# EAGLE board axiom_beta_board_100_v0.16_test-default.fa551eaf (EAGLE 7.7.0), part 1 of 3
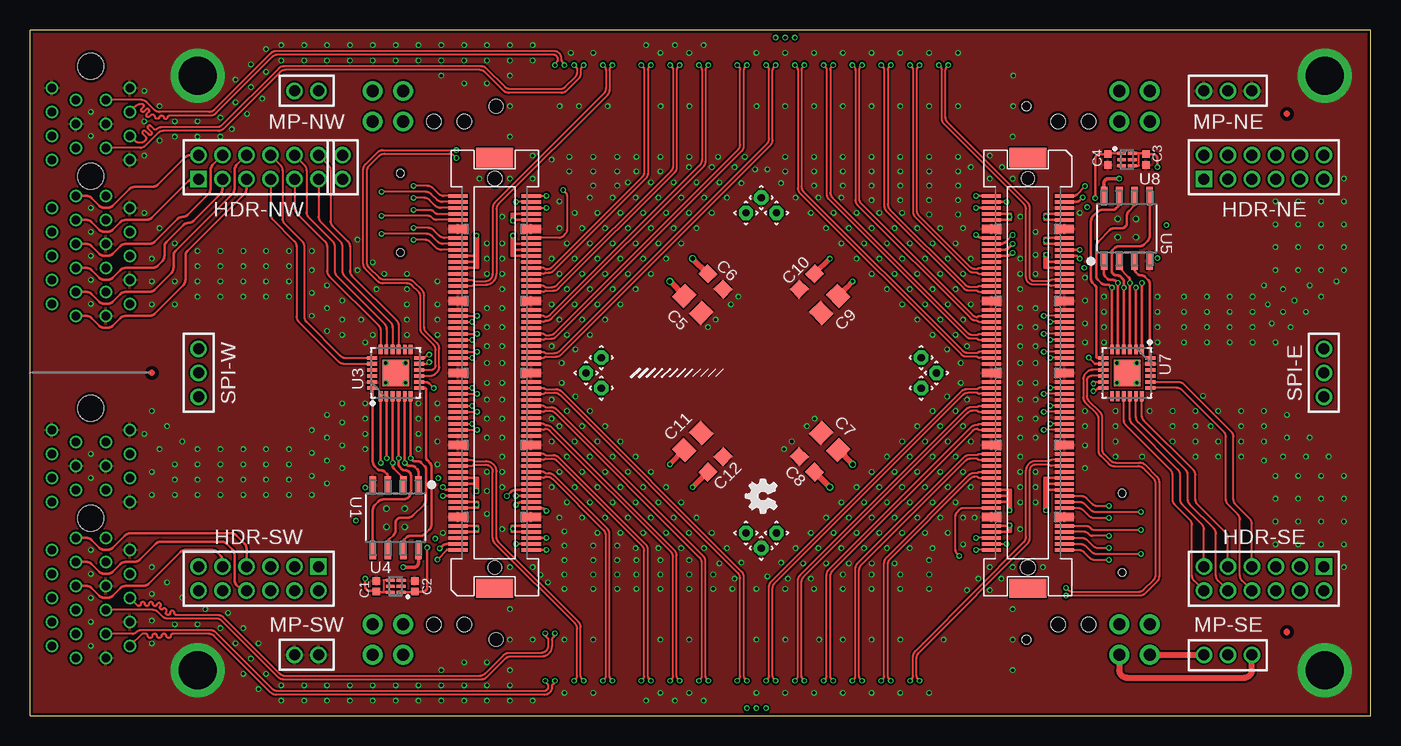
[diagram p0: board, top side]
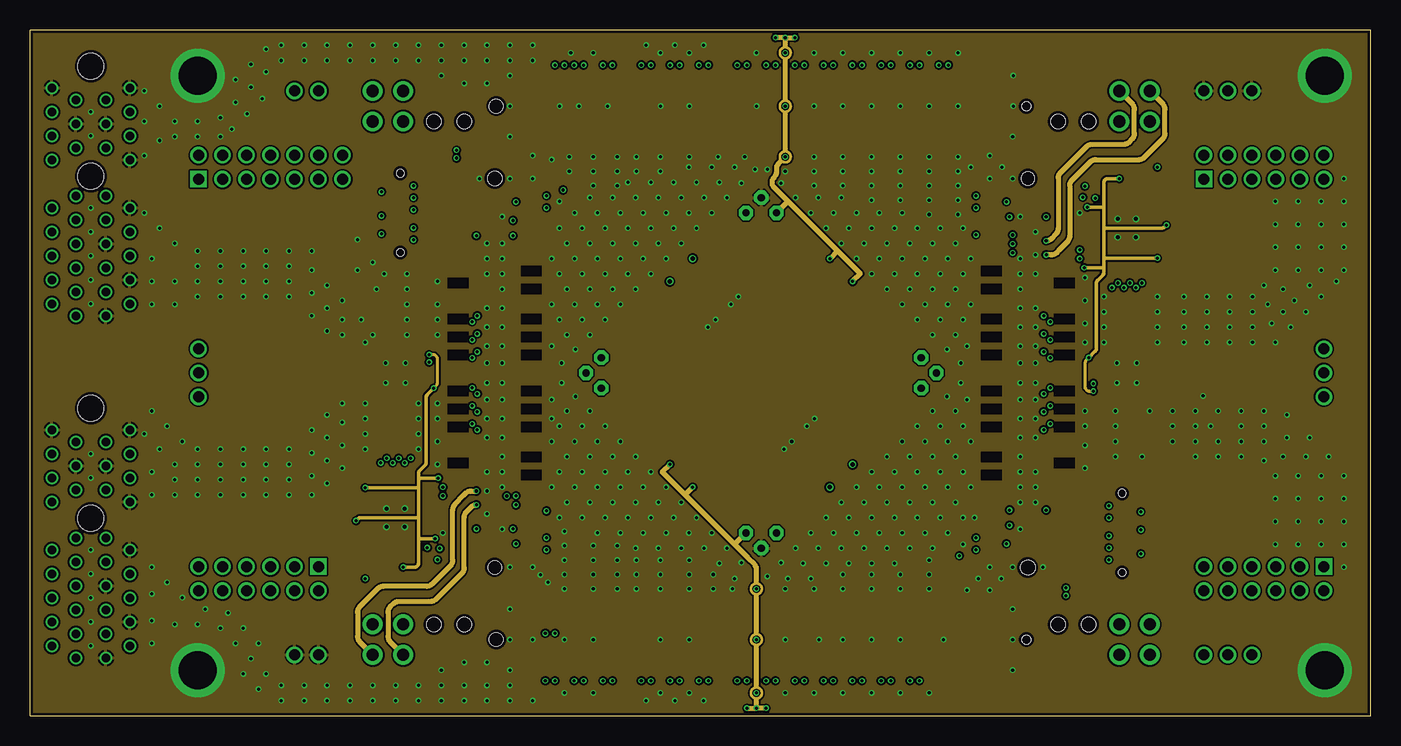
[diagram p1: board, inner layer Route2]
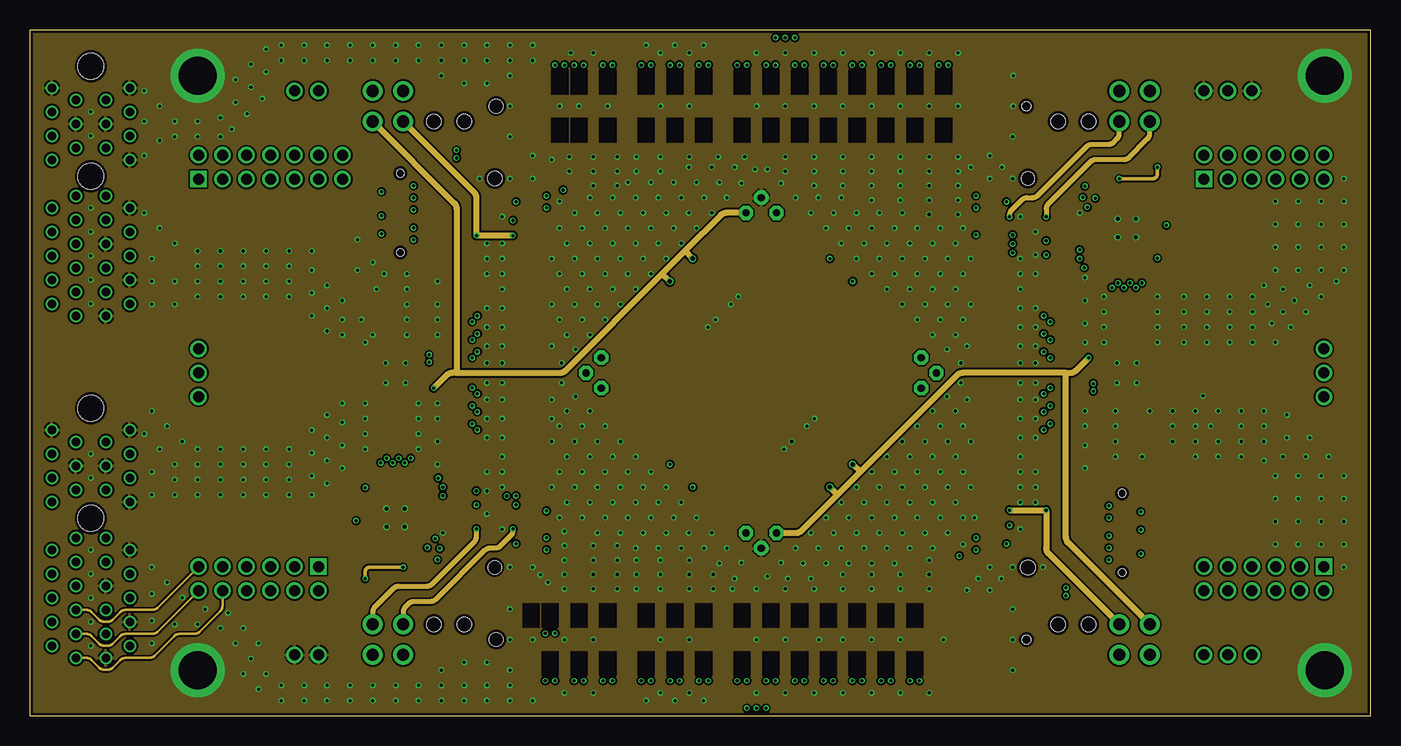
[diagram p2: board, inner layer Route15]
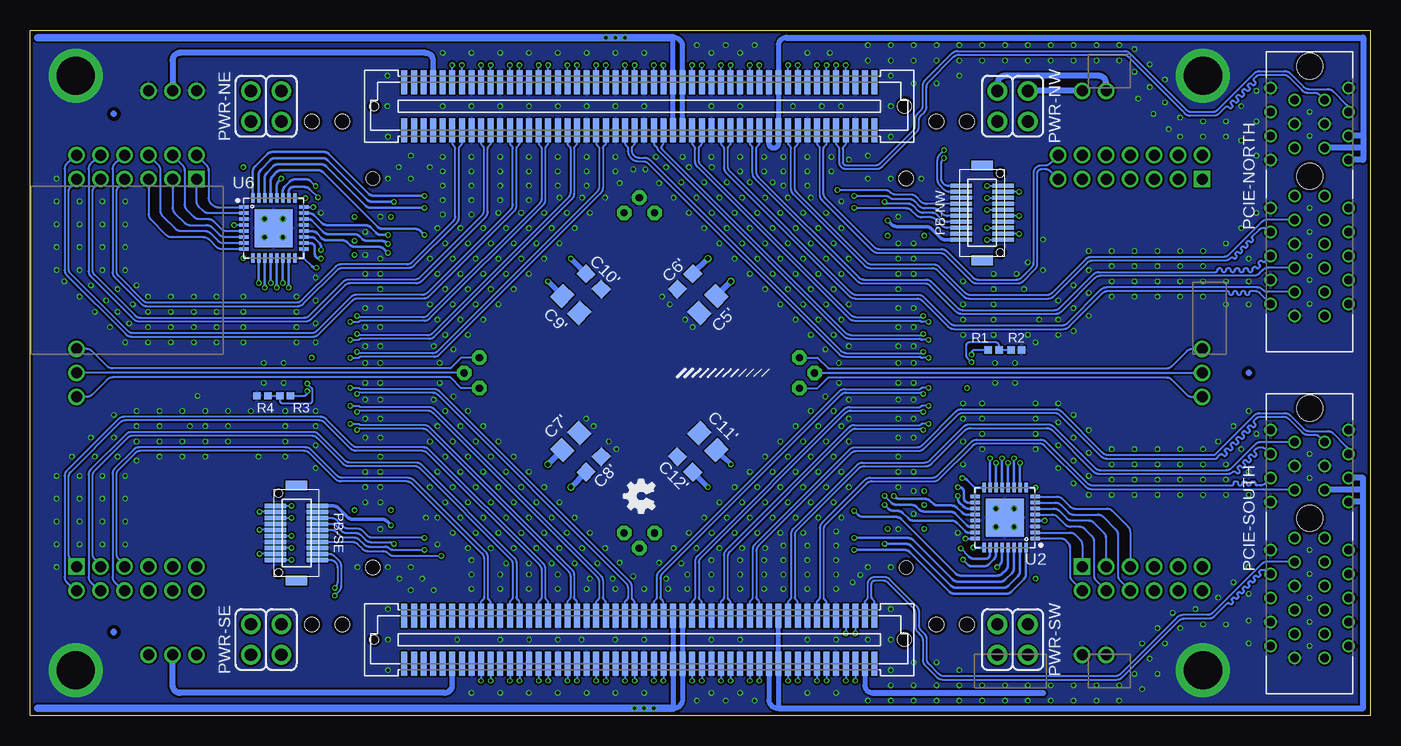
[diagram p3: board, bottom side, seen from below]

Size 111.76 x 57.15 mm. Coordinates in mm from the lower left corner, seen from the top.
Outline: 111.76,57.15 0,57.15 0,0 111.76,0 111.76,57.15
Copper layers (1*2*15*16): Top 0.035559375mm / dielectric 0.17018125mm / Route2 0.01778125mm / dielectric 47mil / Route15 0.01778125mm / dielectric 0.17018125mm / Bottom 0.035559375mm
Design rules "OSHPark-4layer-tuned *": minimum track width 5mil, minimum drill 10mil, track to track 6mil, track to pad 5mil, pad to pad 5mil, via to via 5mil, smd to smd 5mil, copper to edge 10mil, drill to drill 6mil, minimum pad ring 4mil, minimum via ring 4mil, stop-mask expansion 2mil, vias tented up to drill 15mil, thermal gap 6mil
Net classes: 0 default: width 0.152 mm, drill 0.254 mm; 1 power: width 0.152 mm, drill 0.254 mm
Holes 1.2 mm at 33.66,49.53 36.2,49.53 85.72,49.53 88.27,49.53 33.66,7.62 36.2,7.62 85.72,7.62 88.27,7.62
tKeepout: area 105.5,50.8 to 110.5,55.8; area 105.5,1.3 to 110.5,6.3; area 11.5,1.3 to 16.5,6.3; area 11.5,50.8 to 16.5,55.8; area 44.8,12.4 to 77.1,44.7
bKeepout: area 105.5,50.8 to 110.5,55.8; area 105.5,1.3 to 110.5,6.3; area 11.5,1.3 to 16.5,6.3; area 11.5,50.8 to 16.5,55.8
tRestrict: area 104.2,49.6 to 105.3,50.7; area 9.6,28 to 10.7,29.1; area 104.2,6.4 to 105.3,7.5
bRestrict: area 104.2,49.6 to 105.3,50.7; area 9.6,28 to 10.7,29.1; area 104.2,6.4 to 105.3,7.5

## Footprints (pad centres in the part's own frame; a part is rotated, then mirrored left to right if it is on the bottom)
0402-B = smd 0.62 x 0.62: 1 -0.45,0; 2 0.45,0
0805-A = smd 1.35 x 1.55: 1 -1,0; 2 1,0
0603-A = smd 1.15 x 1.1: 1 -0.9,0; 2 0.9,0
2X06M = drill 0.914 square: 1 -5,-1 | drill 0.914: 2 -5,1; 3 -3,-1; 4 -3,1; 5 -1,-1; 6 -1,1; 7 1,-1; 8 1,1; 9 3,-1; 10 3,1; 11 5,-1; 12 5,1
1X02M = drill 0.914: 1 -1,0; 2 1,0
1X03M = drill 0.914: 1 -2,0; 2 0,0; 3 2,0
DF12(XX)-20DP-0.5V = smd 1.8 x 0.35: 1 -1.75,2.25; 2 1.75,2.25; 3 -1.75,1.75; 4 1.75,1.75; 5 -1.75,1.25; 6 1.75,1.25; 7 -1.75,0.75; 8 1.75,0.75; 9 -1.75,0.25; 10 1.75,0.25; 11 -1.75,-0.25; 12 1.75,-0.25; 13 -1.75,-0.75; 14 1.75,-0.75; 15 -1.75,-1.25; 16 1.75,-1.25; 17 -1.75,-1.75; 18 1.75,-1.75; 19 -1.75,-2.25; 20 1.75,-2.25 | smd 1.8 x 0.8: M1 0,3.95; M2 0,-3.95 | hole 0.625: 1.5,-3.3; 1.5,3.3
PCIE-36 = drill 0.7: A1 -11.65,1.25; A2 -10.65,3.25; A3 -9.65,1.25; A4 -8.65,3.25; A5 -7.65,1.25; A6 -6.65,3.25; A7 -5.65,1.25; A8 -4.65,3.25; A9 -3.65,1.25; A10 -2.65,3.25; A11 -1.65,1.25; A12 1.35,3.25; A13 2.35,1.25; A14 3.35,3.25; A15 4.35,1.25; A16 5.35,3.25; A17 6.35,1.25; A18 7.35,3.25; B1 -11.65,-1.25; B2 -10.65,-3.25; B3 -9.65,-1.25; B4 -8.65,-3.25; B5 -7.65,-1.25; B6 -6.65,-3.25; B7 -5.65,-1.25; B8 -4.65,-3.25; B9 -3.65,-1.25; B10 -2.65,-3.25; B11 -1.65,-1.25; B12 1.35,-3.25; B13 2.35,-1.25; B14 3.35,-3.25; B15 4.35,-1.25; B16 5.35,-3.25; B17 6.35,-1.25; B18 7.35,-3.25 | hole 2.15: 0,0; 9.15,0
2X02 = drill 1.016 pad 1.651: 1 -1.27,-1.27; 2 -1.27,1.27; 3 1.27,-1.27; 4 1.27,1.27
SOIC127P600X175-8N = smd 1.473 x 0.559: 1 -2.718,1.905; 2 -2.718,0.635; 3 -2.718,-0.635; 4 -2.718,-1.905; 5 2.718,-1.905; 6 2.718,-0.635; 7 2.718,0.635; 8 2.718,1.905
QFN-32 = smd 0.8 x 0.285: 1 -2.5,1.75; 2 -2.5,1.25; 3 -2.5,0.75; 4 -2.5,0.25; 5 -2.5,-0.25; 6 -2.5,-0.75; 7 -2.5,-1.25; 8 -2.5,-1.75; 17 2.5,-1.75; 18 2.5,-1.25; 19 2.5,-0.75; 20 2.5,-0.25; 21 2.5,0.25; 22 2.5,0.75; 23 2.5,1.25; 24 2.5,1.75 | smd 0.285 x 0.8: 9 -1.75,-2.5; 10 -1.25,-2.5; 11 -0.75,-2.5; 12 -0.25,-2.5; 13 0.25,-2.5; 14 0.75,-2.5; 15 1.25,-2.5; 16 1.75,-2.5; 25 1.75,2.5; 26 1.25,2.5; 27 0.75,2.5; 28 0.25,2.5; 29 -0.25,2.5; 30 -0.75,2.5; 31 -1.25,2.5; 32 -1.75,2.5 | smd 3.15 x 3.15: EP 0,0
QFN50P400X400X80-25N = smd 0.813 x 0.305: 1 -1.956,1.245; 2 -1.956,0.762; 3 -1.956,0.254; 4 -1.956,-0.254; 5 -1.956,-0.762; 6 -1.956,-1.245; 13 1.956,-1.245; 14 1.956,-0.762; 15 1.956,-0.254; 16 1.956,0.254; 17 1.956,0.762; 18 1.956,1.245 | smd 0.305 x 0.813: 7 -1.245,-1.956; 8 -0.762,-1.956; 9 -0.254,-1.956; 10 0.254,-1.956; 11 0.762,-1.956; 12 1.245,-1.956; 19 1.245,1.956; 20 0.762,1.956; 21 0.254,1.956; 22 -0.254,1.956; 23 -0.762,1.956; 24 -1.245,1.956 | smd 2.21 x 2.21: 25 0,0
DFN100X150X50-6N = smd 0.711 x 0.254: 1 -0.457,0.508; 2 -0.457,0; 3 -0.457,-0.508; 4 0.457,-0.508; 5 0.457,0; 6 0.457,0.508
1.2/0.6 = drill 0.6 pad 1.2 octagon: 1 0,0
FX10A-100S/10 = smd 0.3 x 1.6: 1 -14.75,3.05; 2 -14.75,-3.05; 3 -14.25,3.05; 4 -14.25,-3.05; 5 -13.75,3.05; 6 -13.75,-3.05; 7 -13.25,3.05; 8 -13.25,-3.05; 9 -12.75,3.05; 10 -12.75,-3.05; 11 -11.25,3.05; 12 -11.25,-3.05; 13 -10.75,3.05; 14 -10.75,-3.05; 15 -10.25,3.05; 16 -10.25,-3.05; 17 -9.75,3.05; 18 -9.75,-3.05; 19 -9.25,3.05; 20 -9.25,-3.05; 21 -8.75,3.05; 22 -8.75,-3.05; 23 -8.25,3.05; 24 -8.25,-3.05; 25 -7.75,3.05; 26 -7.75,-3.05; 27 -7.25,3.05; 28 -7.25,-3.05; 29 -6.75,3.05; 30 -6.75,-3.05; 31 -5.25,3.05; 32 -5.25,-3.05; 33 -4.75,3.05; 34 -4.75,-3.05; 35 -4.25,3.05; 36 -4.25,-3.05; 37 -3.75,3.05; 38 -3.75,-3.05; 39 -3.25,3.05; 40 -3.25,-3.05; 41 -2.75,3.05; 42 -2.75,-3.05; 43 -2.25,3.05; 44 -2.25,-3.05; 45 -1.75,3.05; 46 -1.75,-3.05; 47 -1.25,3.05; 48 -1.25,-3.05; 49 -0.75,3.05; 50 -0.75,-3.05; 51 0.75,3.05; 52 0.75,-3.05; 53 1.25,3.05; 54 1.25,-3.05; 55 1.75,3.05; 56 1.75,-3.05; 57 2.25,3.05; 58 2.25,-3.05; 59 2.75,3.05; 60 2.75,-3.05; 61 3.25,3.05; 62 3.25,-3.05; 63 3.75,3.05; 64 3.75,-3.05; 65 4.25,3.05; 66 4.25,-3.05; 67 4.75,3.05; 68 4.75,-3.05; 69 5.25,3.05; 70 5.25,-3.05; 71 6.75,3.05; 72 6.75,-3.05; 73 7.25,3.05; 74 7.25,-3.05; 75 7.75,3.05; 76 7.75,-3.05; 77 8.25,3.05; 78 8.25,-3.05; 79 8.75,3.05; 80 8.75,-3.05; 81 9.25,3.05; 82 9.25,-3.05; 83 9.75,3.05; 84 9.75,-3.05; 85 10.25,3.05; 86 10.25,-3.05; 87 10.75,3.05; 88 10.75,-3.05; 89 11.25,3.05; 90 11.25,-3.05; 91 12.75,3.05; 92 12.75,-3.05; 93 13.25,3.05; 94 13.25,-3.05; 95 13.75,3.05; 96 13.75,-3.05; 97 14.25,3.05; 98 14.25,-3.05; 99 14.75,3.05; 100 14.75,-3.05 | smd 0.7 x 1.6: G1 -12,3.05; G2 -12,-3.05; G3 -6,3.05; G4 -6,-3.05; G5 0,3.05; G6 0,-3.05; G7 6,3.05; G8 6,-3.05; G9 12,3.05; G10 12,-3.05 | smd 1.6 x 3.1: M1 -17.95,0; M2 17.95,0 | hole 1.1: -16.2,0 | hole 1.2: 16.2,0
µZ-NOHOLES = smd 0.5 x 2: 1 19.6,-24.226; 2 19.6,-20.226; 3 18.8,-24.226; 4 18.8,-20.226; 5 18,-24.226; 6 18,-20.226; 7 17.2,-24.226; 8 17.2,-20.226; 9 16.4,-24.226; 10 16.4,-20.226; 11 15.6,-24.226; 12 15.6,-20.226; 13 14.8,-24.226; 14 14.8,-20.226; 15 14,-24.226; 16 14,-20.226; 17 13.2,-24.226; 18 13.2,-20.226; 19 12.4,-24.226; 20 12.4,-20.226; 21 11.6,-24.226; 22 11.6,-20.226; 23 10.8,-24.226; 24 10.8,-20.226; 25 10,-24.226; 26 10,-20.226; 27 9.2,-24.226; 28 9.2,-20.226; 29 8.4,-24.226; 30 8.4,-20.226; 31 7.6,-24.226; 32 7.6,-20.226; 33 6.8,-24.226; 34 6.8,-20.226; 35 6,-24.226; 36 6,-20.226; 37 5.2,-24.226; 38 5.2,-20.226; 39 4.4,-24.226; 40 4.4,-20.226; 41 3.6,-24.226; 42 3.6,-20.226; 43 2.8,-24.226; 44 2.8,-20.226; 45 2,-24.226; 46 2,-20.226; 47 1.2,-24.226; 48 1.2,-20.226; 49 0.4,-24.226; 50 0.4,-20.226; 51 -0.4,-24.226; 52 -0.4,-20.226; 53 -1.2,-24.226; 54 -1.2,-20.226; 55 -2,-24.226; 56 -2,-20.226; 57 -2.8,-24.226; 58 -2.8,-20.226; 59 -3.6,-24.226; 60 -3.6,-20.226; 61 -4.4,-24.226; 62 -4.4,-20.226; 63 -5.2,-24.226; 64 -5.2,-20.226; 65 -6,-24.226; 66 -6,-20.226; 67 -6.8,-24.226; 68 -6.8,-20.226; 69 -7.6,-24.226; 70 -7.6,-20.226; 71 -8.4,-24.226; 72 -8.4,-20.226; 73 -9.2,-24.226; 74 -9.2,-20.226; 75 -10,-24.226; 76 -10,-20.226; 77 -10.8,-24.226; 78 -10.8,-20.226; 79 -11.6,-24.226; 80 -11.6,-20.226; 81 -12.4,-24.226; 82 -12.4,-20.226; 83 -13.2,-24.226; 84 -13.2,-20.226; 85 -14,-24.226; 86 -14,-20.226; 87 -14.8,-24.226; 88 -14.8,-20.226; 89 -15.6,-24.226; 90 -15.6,-20.226; 91 -16.4,-24.226; 92 -16.4,-20.226; 93 -17.2,-24.226; 94 -17.2,-20.226; 95 -18,-24.226; 96 -18,-20.226; 97 -18.8,-24.226; 98 -18.8,-20.226; 99 -19.6,-24.226; 100 -19.6,-20.226; 101 19.6,20.226; 102 19.6,24.226; 103 18.8,20.226; 104 18.8,24.226; 105 18,20.226; 106 18,24.226; 107 17.2,20.226; 108 17.2,24.226; 109 16.4,20.226; 110 16.4,24.226; 111 15.6,20.226; 112 15.6,24.226; 113 14.8,20.226; 114 14.8,24.226; 115 14,20.226; 116 14,24.226; 117 13.2,20.226; 118 13.2,24.226; 119 12.4,20.226; 120 12.4,24.226; 121 11.6,20.226; 122 11.6,24.226; 123 10.8,20.226; 124 10.8,24.226; 125 10,20.226; 126 10,24.226; 127 9.2,20.226; 128 9.2,24.226; 129 8.4,20.226; 130 8.4,24.226; 131 7.6,20.226; 132 7.6,24.226; 133 6.8,20.226; 134 6.8,24.226; 135 6,20.226; 136 6,24.226; 137 5.2,20.226; 138 5.2,24.226; 139 4.4,20.226; 140 4.4,24.226; 141 3.6,20.226; 142 3.6,24.226; 143 2.8,20.226; 144 2.8,24.226; 145 2,20.226; 146 2,24.226; 147 1.2,20.226; 148 1.2,24.226; 149 0.4,20.226; 150 0.4,24.226; 151 -0.4,20.226; 152 -0.4,24.226; 153 -1.2,20.226; 154 -1.2,24.226; 155 -2,20.226; 156 -2,24.226; 157 -2.8,20.226; 158 -2.8,24.226; 159 -3.6,20.226; 160 -3.6,24.226; 161 -4.4,20.226; 162 -4.4,24.226; 163 -5.2,20.226; 164 -5.2,24.226; 165 -6,20.226; 166 -6,24.226; 167 -6.8,20.226; 168 -6.8,24.226; 169 -7.6,20.226; 170 -7.6,24.226; 171 -8.4,20.226; 172 -8.4,24.226; 173 -9.2,20.226; 174 -9.2,24.226; 175 -10,20.226; 176 -10,24.226; 177 -10.8,20.226; 178 -10.8,24.226; 179 -11.6,20.226; 180 -11.6,24.226; 181 -12.4,20.226; 182 -12.4,24.226; 183 -13.2,20.226; 184 -13.2,24.226; 185 -14,20.226; 186 -14,24.226; 187 -14.8,20.226; 188 -14.8,24.226; 189 -15.6,20.226; 190 -15.6,24.226; 191 -16.4,20.226; 192 -16.4,24.226; 193 -17.2,20.226; 194 -17.2,24.226; 195 -18,20.226; 196 -18,24.226; 197 -18.8,20.226; 198 -18.8,24.226; 199 -19.6,20.226; 200 -19.6,24.226 | hole 1.125: -22.1,-22.225; -22.1,22.225 | hole 0.725: 22.1,-22.225; 22.1,22.225

## Placement (x,y rotation side)
C1  [0402-B]  28.89,10.79 90 top
C2  [0402-B]  32.07,10.79 90 top
C3  [0402-B]  93.03,46.36 270 top
C4  [0402-B]  89.85,46.36 270 top
C5  [0805-A]  55.25,34.29 315 top
C5'  [0805-A]  55.25,34.29 225 bottom
C6  [0603-A]  57.15,36.2 315 top
C6'  [0603-A]  57.15,36.2 225 bottom
C7  [0805-A]  66.67,22.86 135 top
C7'  [0805-A]  66.67,22.86 45 bottom
C8  [0603-A]  64.77,20.95 135 top
C8'  [0603-A]  64.77,20.95 45 bottom
C9  [0805-A]  66.67,34.29 225 top
C9'  [0805-A]  66.67,34.29 315 bottom
C10  [0603-A]  64.77,36.2 225 top
C10'  [0603-A]  64.77,36.2 315 bottom
C11  [0805-A]  55.25,22.86 45 top
C11'  [0805-A]  55.25,22.86 135 bottom
C12  [0603-A]  57.15,20.95 45 top
C12'  [0603-A]  57.15,20.95 135 bottom
HDR-NE  [2X06M]  102.87,45.72 0 top
HDR-NW  [2X06M]  19.05,45.72 0 top
HDR-SE  [2X06M]  102.87,11.43 180 top
HDR-SW  [2X06M]  19.05,11.43 180 top
LOGO1  OSHW_LOGO_FILLX0100-NT  [OSHW_FILLX100_NOTEXT]  62.23,16.89 90 top
LOGO2  OSHW_LOGO_FILLX0100-NT  [OSHW_FILLX100_NOTEXT]  59.69,16.89 90 bottom
M-LVDS  [1X02M]  26.05,45.72 270 top
MP-NE  [1X03M]  99.87,52.08 180 top
MP-NW  [1X02M]  23.05,52.07 0 top
MP-SE  [1X03M]  99.87,5.07 0 top
MP-SW  [1X02M]  23.05,5.08 0 top
PB-NW  DF12(XX)-20DP-0.5V  [DF12(XX)-20DP-0.5V]  32.39,41.91 0 bottom
PB-SE  DF12(XX)-20DP-0.5V  [DF12(XX)-20DP-0.5V]  89.53,15.24 180 bottom
PCIE-NORTH  PCIE-36-AXIOMSOCKET  [PCIE-36]  5.08,44.97 90 bottom
PCIE-SOUTH  PCIE-36-AXIOMSOCKET  [PCIE-36]  5.08,16.48 90 bottom
PWR-NE  PINHD-2X02_2.54  [2X02]  92.08,50.8 180 bottom
PWR-NW  PINHD-2X02_2.54  [2X02]  29.85,50.8 0 bottom
PWR-SE  PINHD-2X02_2.54  [2X02]  92.08,6.35 180 bottom
PWR-SW  PINHD-2X02_2.54  [2X02]  29.85,6.35 0 bottom
R1  [0402-B]  31.43,30.48 0 bottom
R2  [0402-B]  29.53,30.48 0 bottom
R3  [0402-B]  90.49,26.67 180 bottom
R4  [0402-B]  92.39,26.67 180 bottom
SPI-E  PINHD-2X02_2.00  [1X03M]  107.87,28.57 270 top
SPI-W  PINHD-2X02_2.00  [1X03M]  14.05,28.57 90 top
U1  SST25VF020B  [SOIC127P600X175-8N]  30.48,16.51 270 top
U2  ICE40_LP384-SG32  [QFN-32]  30.48,16.51 180 bottom
U3  MCP23018QFN  [QFN50P400X400X80-25N]  30.48,28.57 90 top
U4  LD6806F  [DFN100X150X50-6N]  30.48,10.79 180 top
U5  SST25VF020B  [SOIC127P600X175-8N]  91.44,40.64 90 top
U6  ICE40_LP384-SG32  [QFN-32]  91.44,40.64 0 bottom
U7  MCP23018QFN  [QFN50P400X400X80-25N]  91.44,28.57 270 top
U8  LD6806F  [DFN100X150X50-6N]  91.44,46.36 0 top
U$1  PINPAD1.27MM  [1.2/0.6]  46.36,28.57 45 top
U$2  PINPAD1.27MM  [1.2/0.6]  47.62,27.3 45 top
U$11  PINPAD1.27MM  [1.2/0.6]  47.62,29.84 45 top
U$14  PINPAD1.27MM  [1.2/0.6]  75.56,28.57 45 top
U$15  PINPAD1.27MM  [1.2/0.6]  74.3,29.84 45 top
U$16  PINPAD1.27MM  [1.2/0.6]  74.3,27.3 45 top
U$17  PINPAD1.27MM  [1.2/0.6]  60.96,43.18 45 top
U$18  PINPAD1.27MM  [1.2/0.6]  59.69,41.91 45 top
U$19  PINPAD1.27MM  [1.2/0.6]  62.23,41.91 45 top
U$20  PINPAD1.27MM  [1.2/0.6]  60.96,13.97 45 top
U$21  PINPAD1.27MM  [1.2/0.6]  62.23,15.24 45 top
U$22  PINPAD1.27MM  [1.2/0.6]  59.69,15.24 45 top
X-EAST  FX10-100/10S  [FX10A-100S/10]  83.19,28.57 270 top
X-WEST  FX10-100/10S  [FX10A-100S/10]  38.73,28.57 90 top
ZED1  µZ-FCI-NOHOLES  [µZ-NOHOLES]  60.96,28.57 180 bottom

## Library data of the parts
C1-C5 C5' C6 C6' C7 C7' C8 C8' C9 C9' C10 C10' C11 C11' C12 C12' R1-R4 = generic-rcl
HDR-NE HDR-NW HDR-SE HDR-SW = pinhead-2
LOGO1 LOGO2 = ohw-logo
M-LVDS MP-NE MP-NW MP-SE MP-SW PWR-NE PWR-NW PWR-SE PWR-SW SPI-E SPI-W = pincon
PB-NW PB-SE = df12
PCIE-NORTH PCIE-SOUTH = PCIe
U1 U5 = flash
U2 U6 = iCE40
U3 U7 = microchip-exp
U4 U8 = ldo
U$1 U$2 U$11 U$14-U$22 = pinpad
X-EAST X-WEST = fx10
ZED1 = microzed

## Nets
!HOLD!_N: U5.7 U7.7
!HOLD!_S: U1.7 U3.7
!WP!_N: U5.3 U7.24
!WP!_SW: U1.3 U3.24
A_SCL: PB-NW.1 U3.9
A_SDA: PB-NW.3 U3.10
B_SCL: PB-SE.1 U7.9
B_SDA: PB-SE.3 U7.10
BANK13_00_N [power]: PCIE-NORTH.A14 ZED1.89
BANK13_00_P [power]: PCIE-NORTH.A13 ZED1.87
BANK13_01_N [power]: M-LVDS.1 ZED1.90
BANK13_01_P [power]: M-LVDS.2 ZED1.88
BANK13_02_N [power]: PCIE-NORTH.A16 ZED1.93
BANK13_02_P [power]: PCIE-NORTH.A17 ZED1.91
BANK13_03_N [power]: PCIE-NORTH.B16 ZED1.94
BANK13_03_P [power]: PCIE-NORTH.B17 ZED1.92
BANK13_04_N [power]: PCIE-SOUTH.A6 ZED1.195
BANK13_04_P [power]: PCIE-SOUTH.A5 ZED1.193
BANK13_05_N: PCIE-SOUTH.A3 ZED1.196
BANK13_05_P: PCIE-SOUTH.A2 ZED1.194
BANK13_06_N [power]: PCIE-SOUTH.A8 ZED1.199
BANK13_06_P [power]: PCIE-SOUTH.A9 ZED1.197
C_CK_E: SPI-E.2 U$14.1
C_CK_W: SPI-W.2 U$1.1
C_SI_E: SPI-E.1 U$15.1
C_SI_W: SPI-W.1 U$2.1
C_SO_E: SPI-E.3 U$16.1
C_SO_W: SPI-W.3 U$11.1
CDONE_N: U6.11 U7.2
CDONE_S: U2.11 U3.2
CRESET_N: U6.10 U7.1
CRESET_S: U2.10 U3.1
E_EN: U6.23 X-EAST.14
E_I2C_V: PWR-NE.1 X-EAST.11 X-EAST.13
E_SCK: U6.29 X-EAST.12
E_SCL: U6.19 X-EAST.15
E_SDA: U6.18 X-EAST.17
E_SDI: U6.22 X-EAST.16
E_SDI_V: PWR-NE.3 X-EAST.19 X-EAST.21
E_SDO: U6.20 X-EAST.18
E_VE: PWR-SE.1 X-EAST.79 X-EAST.81 X-EAST.83 X-EAST.84 X-EAST.86 X-EAST.88
E_VE_CV: PB-SE.7 X-EAST.90
E_VE_OV: PB-SE.10 X-EAST.93
E_VE_UV: PB-SE.12 X-EAST.91
GND: C1.2 C2.2 C3.2 C4.2 C5'.2 C5.2 C6'.2 C6.2 C7'.2 C7.2 C8'.2 C8.2 C9'.2 C9.2 C10'.2 C10.2 C11'.2 C11.2 C12'.2 C12.2 MP-NE.1 MP-NE.3 MP-SW.1 MP-SW.2 PB-NW.5 PB-NW.8 PB-NW.9 PB-NW.14 PB-NW.17 PB-SE.5 PB-SE.8 PB-SE.9 PB-SE.14 PB-SE.17 PCIE-NORTH.A1 PCIE-NORTH.A4 PCIE-NORTH.A7 PCIE-NORTH.A10 PCIE-NORTH.A12 PCIE-NORTH.A15 PCIE-NORTH.A18 PCIE-NORTH.B15 PCIE-NORTH.B18 PCIE-SOUTH.A1 PCIE-SOUTH.A4 PCIE-SOUTH.A7 PCIE-SOUTH.A10 PCIE-SOUTH.A12 PCIE-SOUTH.A15 PCIE-SOUTH.A18 PCIE-SOUTH.B15 PCIE-SOUTH.B18 R2.2 R4.2 U1.4 U2.3 U2.21 U2.EP U3.23 U4.3 U5.4 U6.3 U6.21 U6.EP U7.23 U8.3 U$17.1 U$20.1 X-EAST.5 X-EAST.20 X-EAST.23 X-EAST.26 X-EAST.29 X-EAST.31 X-EAST.32 X-EAST.37 X-EAST.38 X-EAST.43 X-EAST.44 X-EAST.49 X-EAST.50 X-EAST.51 X-EAST.52 X-EAST.57 X-EAST.58 X-EAST.63 X-EAST.64 X-EAST.69 X-EAST.70 X-EAST.71 X-EAST.76 X-EAST.77 X-EAST.82 X-EAST.G1 X-EAST.G2 X-EAST.G3 X-EAST.G4 X-EAST.G5 X-EAST.G6 X-EAST.G7 X-EAST.G8 X-EAST.G9 X-EAST.G10 X-WEST.5 X-WEST.20 X-WEST.23 X-WEST.26 X-WEST.29 X-WEST.31 X-WEST.32 X-WEST.37 X-WEST.38 X-WEST.43 X-WEST.44 X-WEST.49 X-WEST.50 X-WEST.51 X-WEST.52 X-WEST.57 X-WEST.58 X-WEST.63 X-WEST.64 X-WEST.69 X-WEST.70 X-WEST.71 X-WEST.76 X-WEST.77 X-WEST.82 X-WEST.G1 X-WEST.G2 X-WEST.G3 X-WEST.G4 X-WEST.G5 X-WEST.G6 X-WEST.G7 X-WEST.G8 X-WEST.G9 X-WEST.G10 ZED1.15 ZED1.16 ZED1.21 ZED1.22 ZED1.27 ZED1.28 ZED1.33 ZED1.34 ZED1.39 ZED1.40 ZED1.45 ZED1.46 ZED1.51 ZED1.52 ZED1.65 ZED1.66 ZED1.71 ZED1.72 ZED1.77 ZED1.85 ZED1.86 ZED1.95 ZED1.96 ZED1.115 ZED1.116 ZED1.121 ZED1.122 ZED1.127 ZED1.128 ZED1.133 ZED1.134 ZED1.139 ZED1.140 ZED1.145 ZED1.146 ZED1.151 ZED1.152 ZED1.165 ZED1.166 ZED1.171 ZED1.172 ZED1.177 ZED1.185 ZED1.186 ZED1.191 ZED1.192
GPA0_E: HDR-SE.12 U7.15
GPA0_W: HDR-NW.12 U3.15
GPA1_E: HDR-SE.11 U7.16
GPA1_W: HDR-NW.11 U3.16
GPA2_E: HDR-SE.10 U7.17
GPA2_W: HDR-NW.10 U3.17
GPA3_E: HDR-SE.9 U7.18
GPA3_W: HDR-NW.9 U3.18
GPA4_E: HDR-SE.8 U7.19
GPA4_W: HDR-NW.8 U3.19
GPA5_E: HDR-SE.7 U7.20
GPA5_W: HDR-NW.7 U3.20
GPA6_E: U7.21
GPA6_W: U3.21
GPA7_E: U7.22
GPA7_W: U3.22
IOL_2A_N: HDR-NE.1 U6.2
IOL_2A_S: HDR-SW.1 U2.2
IOL_2B_N: HDR-NE.2 U6.1
IOL_2B_S: HDR-SW.2 U2.1
IOL_4A_N: HDR-NE.4 U6.5
IOL_4A_S: HDR-SW.4 U2.5
IOL_4B_N: HDR-NE.3 U6.6
IOL_4B_S: HDR-SW.3 U2.6
IOL_5A_N: HDR-NE.5 U6.8
IOL_5A_S: HDR-SW.5 U2.8
IOL_5B_N: HDR-NE.6 U6.7
IOL_5B_S: HDR-SW.6 U2.7
JTAG_V: PWR-SW.3 X-WEST.19 X-WEST.21
JX1_00_N [power]: X-EAST.27 ZED1.13
JX1_00_P [power]: X-EAST.25 ZED1.11
JX1_01_N [power]: HDR-NE.8 ZED1.14
JX1_01_P [power]: HDR-NE.7 ZED1.12
JX1_02_N [power]: X-EAST.24 ZED1.19
JX1_02_P [power]: X-EAST.22 ZED1.17
JX1_03_N [power]: HDR-NE.10 ZED1.20
JX1_03_P [power]: HDR-NE.9 ZED1.18
JX1_04_N [power]: X-EAST.30 ZED1.25
JX1_04_P [power]: X-EAST.28 ZED1.23
JX1_05_N: HDR-NE.12 ZED1.26
JX1_05_P: HDR-NE.11 ZED1.24
JX1_06_N [power]: X-EAST.36 ZED1.31
JX1_06_P [power]: X-EAST.34 ZED1.29
JX1_07_N [power]: X-EAST.35 ZED1.32
JX1_07_P [power]: X-EAST.33 ZED1.30
JX1_08_N: X-EAST.42 ZED1.37
JX1_08_P: X-EAST.40 ZED1.35
JX1_09_N [power]: X-EAST.41 ZED1.38
JX1_09_P [power]: X-EAST.39 ZED1.36
JX1_10_N [power]: X-EAST.48 ZED1.43
JX1_10_P [power]: X-EAST.46 ZED1.41
JX1_11_N [power]: X-EAST.47 ZED1.44
JX1_11_P [power]: X-EAST.45 ZED1.42
JX1_12_N [power]: X-WEST.56 ZED1.49
JX1_12_P [power]: X-WEST.54 ZED1.47
JX1_13_N [power]: X-WEST.55 ZED1.50
JX1_13_P [power]: X-WEST.53 ZED1.48
JX1_14_N [power]: X-WEST.62 ZED1.55
JX1_14_P [power]: X-WEST.60 ZED1.53
JX1_15_N: X-WEST.61 ZED1.56
JX1_15_P: X-WEST.59 ZED1.54
JX1_16_N [power]: X-WEST.68 ZED1.63
JX1_16_P [power]: X-WEST.66 ZED1.61
JX1_17_N [power]: X-WEST.67 ZED1.64
JX1_17_P [power]: X-WEST.65 ZED1.62
JX1_18_N [power]: X-WEST.74 ZED1.69
JX1_18_P [power]: X-WEST.72 ZED1.67
JX1_19_N [power]: PCIE-NORTH.A3 ZED1.70
JX1_19_P [power]: PCIE-NORTH.A2 ZED1.68
JX1_20_N: X-WEST.80 ZED1.75
JX1_20_P: X-WEST.78 ZED1.73
JX1_21_N: PCIE-NORTH.A6 ZED1.76
JX1_21_P: PCIE-NORTH.A5 ZED1.74
JX1_22_N: X-WEST.75 ZED1.83
JX1_22_P: X-WEST.73 ZED1.81
JX1_23_N [power]: PCIE-NORTH.A9 ZED1.84
JX1_23_P [power]: PCIE-NORTH.A8 ZED1.82
JX2_00_N [power]: HDR-SE.6 ZED1.119
JX2_00_P [power]: HDR-SE.5 ZED1.117
JX2_01_N [power]: X-EAST.73 ZED1.120
JX2_01_P [power]: X-EAST.75 ZED1.118
JX2_02_N [power]: HDR-SE.4 ZED1.125
JX2_02_P [power]: HDR-SE.3 ZED1.123
JX2_03_N [power]: X-EAST.78 ZED1.126
JX2_03_P [power]: X-EAST.80 ZED1.124
JX2_04_N [power]: HDR-SE.2 ZED1.131
JX2_04_P [power]: HDR-SE.1 ZED1.129
JX2_05_N [power]: X-EAST.72 ZED1.132
JX2_05_P [power]: X-EAST.74 ZED1.130
JX2_06_N [power]: X-EAST.65 ZED1.137
JX2_06_P [power]: X-EAST.67 ZED1.135
JX2_07_N [power]: X-EAST.66 ZED1.138
JX2_07_P [power]: X-EAST.68 ZED1.136
JX2_08_N [power]: X-EAST.59 ZED1.143
JX2_08_P [power]: X-EAST.61 ZED1.141
JX2_09_N [power]: X-EAST.60 ZED1.144
JX2_09_P [power]: X-EAST.62 ZED1.142
JX2_10_N [power]: X-EAST.53 ZED1.149
JX2_10_P [power]: X-EAST.55 ZED1.147
JX2_11_N [power]: X-EAST.54 ZED1.150
JX2_11_P [power]: X-EAST.56 ZED1.148
JX2_12_N [power]: X-WEST.45 ZED1.155
JX2_12_P [power]: X-WEST.47 ZED1.153
JX2_13_N [power]: X-WEST.46 ZED1.156
JX2_13_P [power]: X-WEST.48 ZED1.154
JX2_14_N: X-WEST.39 ZED1.163
JX2_14_P: X-WEST.41 ZED1.161
JX2_15_N [power]: X-WEST.40 ZED1.164
JX2_15_P [power]: X-WEST.42 ZED1.162
JX2_16_N [power]: X-WEST.33 ZED1.169
JX2_16_P [power]: X-WEST.35 ZED1.167
JX2_17_N [power]: X-WEST.34 ZED1.170
JX2_17_P [power]: X-WEST.36 ZED1.168
JX2_18_N [power]: PCIE-SOUTH.B17 ZED1.175
JX2_18_P [power]: PCIE-SOUTH.B16 ZED1.173
JX2_19_N [power]: X-WEST.28 ZED1.176
JX2_19_P [power]: X-WEST.30 ZED1.174
JX2_20_N [power]: PCIE-SOUTH.A16 ZED1.183
JX2_20_P [power]: PCIE-SOUTH.A17 ZED1.181
JX2_21_N [power]: X-WEST.22 ZED1.184
JX2_21_P [power]: X-WEST.24 ZED1.182
JX2_22_N: PCIE-SOUTH.A13 ZED1.189
JX2_22_P: PCIE-SOUTH.A14 ZED1.187
JX2_23_N [power]: X-WEST.25 ZED1.190
JX2_23_P [power]: X-WEST.27 ZED1.188
M_V_NW: C1.1 C5'.1 C5.1 C6'.1 C6.1 PWR-NW.3 R1.1 U1.8 U2.4 U2.9 U2.16 U2.17 U2.24 U2.28 U3.8 U3.12 U4.4 U4.6 U$18.1
M_V_SE: C3.1 C7'.1 C7.1 C8'.1 C8.1 PWR-SE.3 R3.1 U5.8 U6.4 U6.9 U6.16 U6.17 U6.24 U6.28 U7.8 U7.12 U8.4 U8.6 U$21.1
N$1: ZED1.9
N$9: R3.2 R4.1 U7.11
N$46: ZED1.10
N$47: ZED1.113
N$48: ZED1.114
N$49: ZED1.200
N$50: ZED1.97
N$51: ZED1.99
N$52: ZED1.98
N$53: ZED1.100
N$106 [power]: MP-SE.2 ZED1.112
N$113: MP-NW.1 PWR-NW.2
N$114: MP-NW.2 PWR-NW.4
N$196: HDR-NW.1 PCIE-NORTH.B9
N$197: HDR-NW.3 PCIE-NORTH.B5
N$198: HDR-NW.5 PCIE-NORTH.B1
N$200: R1.2 R2.1 U3.11
N$202: HDR-NW.2 PCIE-NORTH.B11
N$203: HDR-NW.4 PCIE-NORTH.B7
N$209: PCIE-SOUTH.A11
N$211: PCIE-SOUTH.B2
N$212: HDR-NW.6 PCIE-NORTH.B3
N$214: PCIE-SOUTH.B4
N$216: PCIE-SOUTH.B6
N$218: PCIE-SOUTH.B8
N$220: PCIE-SOUTH.B10
N$223: PCIE-NORTH.B10
N$226: PCIE-NORTH.B8
N$233: PCIE-NORTH.B6
N$235: MP-SE.3 PWR-SE.2
N$236: PCIE-NORTH.B4
N$238: PCIE-NORTH.B2
N$240: MP-SE.1 PWR-SE.4
N$243: HDR-SW.8 PCIE-SOUTH.B9
N$244: HDR-SW.10 PCIE-SOUTH.B1
N$245: HDR-SW.12 PCIE-SOUTH.B3
N$246: HDR-SW.11 PCIE-SOUTH.B5
N$247: HDR-SW.9 PCIE-SOUTH.B7
N$248: HDR-SW.7 PCIE-SOUTH.B11
N$256: PCIE-NORTH.A11
N_CHK_V: PB-NW.19 X-WEST.92 X-WEST.94
N_I2C_V: PWR-NE.4 X-EAST.7 X-EAST.9
N_SCK: U6.32 X-EAST.2
N_SCL: U6.27 X-EAST.1
N_SDA: U6.26 X-EAST.3
N_SDI: U6.30 X-EAST.6
N_SDO: U6.31 X-EAST.4
N_SPI_V: PWR-NE.2 X-EAST.8 X-EAST.10
N_VE_CV: PB-NW.11 X-WEST.100
N_VE_OV: PB-NW.2 X-WEST.99
N_VE_UV: PB-NW.16 X-WEST.89
N_VN_CV: PB-NW.13 X-WEST.98
N_VN_OV: PB-NW.4 X-WEST.97
N_VN_UV: PB-NW.18 X-WEST.87
N_VW_CV: PB-NW.15 X-WEST.96
N_VW_OV: PB-NW.6 X-WEST.95
N_VW_UV: PB-NW.20 X-WEST.85
PCIE_N_V: PCIE-NORTH.B12 PCIE-NORTH.B13 PCIE-NORTH.B14 ZED1.78 ZED1.79 ZED1.80
PCIE_S_V: PCIE-SOUTH.B12 PCIE-SOUTH.B13 PCIE-SOUTH.B14 ZED1.178 ZED1.179 ZED1.180
S_CHK_V: PB-SE.19 X-EAST.92 X-EAST.94
S_I2C_V: PWR-SW.4 X-WEST.7 X-WEST.9
S_SCK: U2.32 X-WEST.2
S_SCL: U2.27 X-WEST.1
S_SDA: U2.26 X-WEST.3
S_SDI: U2.30 X-WEST.6
S_SDO: U2.31 X-WEST.4
S_SPI_V: PWR-SW.2 X-WEST.8 X-WEST.10
S_VE_CV: PB-SE.15 X-EAST.96
S_VE_OV: PB-SE.6 X-EAST.95
S_VE_UV: PB-SE.20 X-EAST.85
S_VS_CV: PB-SE.13 X-EAST.98
S_VS_OV: PB-SE.4 X-EAST.97
S_VS_UV: PB-SE.18 X-EAST.87
S_VW_CV: PB-SE.11 X-EAST.100
S_VW_OV: PB-SE.2 X-EAST.99
S_VW_UV: PB-SE.16 X-EAST.89
SCK_N: U5.6 U6.15 U7.6
SCK_S: U1.6 U2.15 U3.6
SDI_N: U5.5 U6.13 U7.4
SDI_S: U1.5 U2.13 U3.4
SDO_N: U5.2 U6.12 U7.3
SDO_S: U1.2 U2.12 U3.3
SS_N: U5.1 U6.14 U7.5
SS_S: U1.1 U2.14 U3.5
TCK: U2.29 X-WEST.12
TDI: U2.22 X-WEST.16
TDO: U2.20 X-WEST.18
TMS: U2.23 X-WEST.14
V12_NW: C2.1 U2.25 U4.1
V12_SE: C4.1 U6.25 U8.1
VBAT: MP-NE.2 ZED1.7
VCCO_13 [power]: ZED1.198
VIN_HDR_N [power]: C9'.1 C9.1 C10'.1 C10.1 U$19.1 ZED1.57 ZED1.58 ZED1.59 ZED1.60
VIN_HDR_S [power]: C11'.1 C11.1 C12'.1 C12.1 U$22.1 ZED1.157 ZED1.158 ZED1.159 ZED1.160
W_I2C_V: PWR-SW.1 X-WEST.11 X-WEST.13
W_SCL: U2.19 X-WEST.15
W_SDA: U2.18 X-WEST.17
W_VW: PWR-NW.1 X-WEST.79 X-WEST.81 X-WEST.83 X-WEST.84 X-WEST.86 X-WEST.88
W_VW_CV: PB-NW.7 X-WEST.90
W_VW_OV: PB-NW.10 X-WEST.93
W_VW_UV: PB-NW.12 X-WEST.91

## Tracks (layer width: path | path; a pad name or v marks a point on that pad's centre or on a via)
!HOLD!_N
  Top 0.203: U5.7 90.81,42.7 arc-45 90.69,42.43 90.54,42.28 arc-45 90.27,42.16 89.42,42.16 arc45 88.97,41.98 88.64,41.65 arc45 88.45,41.2 88.45,36.36 arc45 88.57,36.09 88.79,35.87 arc-45 88.9,35.6 88.9,29.95 arc90 89.03,29.82 U7.7
!HOLD!_S
  Top 0.203: U1.7 31.12,14.45 arc-45 31.23,14.72 31.38,14.87 arc-45 31.65,14.99 32.5,14.99 arc45 32.95,15.17 33.28,15.5 arc45 33.47,15.95 33.47,20.79 arc45 33.35,21.05 33.13,21.28 arc-45 33.02,21.55 33.02,27.2 arc90 32.89,27.33 U3.7
!WP!_N
  Top 0.203: U5.3 92.08,37.24 arc45 92.19,36.97 92.34,36.81 arc45 92.61,36.7 92.68,36.7 arc-45 92.95,36.59 93.23,36.31 arc-45 93.34,36.04 93.34,29.82 U7.24
!WP!_SW
  Top 0.203: U1.3 29.85,19.91 arc45 29.73,20.18 29.58,20.34 arc45 29.31,20.45 29.24,20.45 arc-45 28.97,20.56 28.76,20.77 arc-45 28.58,21.22 28.58,27.33 U3.24
A_SCL  (via drill 0.25)
  Top 0.152: U3.9 33.35,28.32 arc45 33.8,28.51 33.94,28.64 arc45 34.12,29.09 34.12,30.6 arc45 33.94,31.05 33.04,31.95 arc-45 32.86,32.39 32.86,35.04 arc45 32.67,35.49 32,36.16 arc45 31.55,36.35 29.54,36.35 arc-45 29.09,36.53 28.28,37.34 arc-45 28.09,37.79 28.09,45.39 arc-45 28.28,45.84 29.09,46.65 arc-45 29.54,46.84 34.94,46.84 arc-45 35.39,46.65 v35.56,46.48
  Bottom 0.152: PB-NW.1 35.17,44.16 arc45 35.62,44.35 arc45 35.79,44.75 35.79,45.99 arc45 35.6,46.44 v35.56,46.48
A_SDA  (via drill 0.25)
  Top 0.152: U3.10 33.44,28.83 arc90 33.82,29.21 33.82,30.47 arc45 33.63,30.92 32.74,31.82 arc-45 32.55,32.27 32.55,34.92 arc45 32.36,35.37 31.87,35.86 arc45 31.42,36.04 29.41,36.04 arc-45 28.96,36.23 27.97,37.22 arc-45 27.79,37.66 27.79,45.52 arc-45 27.97,45.97 28.96,46.96 arc-45 29.41,47.14 v35.56,47.14
  Bottom 0.152: PB-NW.3 35.1,43.66 arc45 35.55,43.85 35.91,44.2 arc45 36.09,44.65 36.09,46.35 arc45 35.91,46.8 v35.56,47.14
B_SCL  (via drill 0.25)
  Top 0.152: U7.9 88.57,28.83 arc45 88.12,28.64 87.98,28.51 arc45 87.8,28.06 87.8,26.55 arc45 87.98,26.1 88.88,25.2 arc-45 89.06,24.76 89.06,22.11 arc45 89.25,21.66 89.92,20.99 arc45 90.37,20.8 92.38,20.8 arc-45 92.83,20.62 93.64,19.81 arc-45 93.83,19.36 93.83,11.76 arc-45 93.64,11.31 92.83,10.5 arc-45 92.38,10.31 86.98,10.31 arc-45 86.53,10.5 v86.36,10.67
  Bottom 0.152: PB-SE.1 86.72,12.99 arc45 86.32,12.82 arc45 86.13,12.37 86.13,11.16 arc45 86.32,10.71 v86.36,10.67
B_SDA  (via drill 0.25)
  Top 0.152: U7.10 88.48,28.32 arc90 88.1,27.94 88.1,26.68 arc45 88.29,26.23 89.18,25.33 arc-45 89.37,24.88 89.37,22.23 arc45 89.56,21.79 90.05,21.29 arc45 90.5,21.11 92.51,21.11 arc-45 92.96,20.92 93.95,19.93 arc-45 94.13,19.48 94.13,11.63 arc-45 93.95,11.18 92.96,10.19 arc-45 92.51,10.01 v86.36,10.01
  Bottom 0.152: PB-SE.3 86.82,13.49 arc45 86.37,13.3 86.01,12.95 arc45 85.83,12.5 85.83,10.8 arc45 86.01,10.36 v86.36,10.01
BANK13_00_N  (via drill 0.25)
  Top 0.152: v45.36,54.23 45.5,54.09 arc-45 45.61,53.82 45.61,53.66 arc-45 45.42,53.21 44.62,52.41 arc-45 44.17,52.22 40.04,52.22 arc-45 39.59,52.41 38.06,53.94 arc45 37.61,54.13 21.16,54.13 arc45 20.71,53.94 16.01,49.23 arc-45 15.56,49.05 10.95,49.05 arc45 10.55,48.88 arc-90 10.34,48.88 10.06,49.16 arc90 9.84,49.16 9.84,49.16 arc90 9.84,48.94 10.12,48.66 arc-90 10.12,48.45 10.11,48.44 arc-90 9.9,48.44 9.62,48.72 arc90 9.41,48.72 9.4,48.72 arc90 9.4,48.5 9.61,48.29 arc-90 9.61,47.94 arc-90 8.71,47.94 PCIE-NORTH.A14
  Bottom 0.152: ZED1.89 v45.36,54.23
BANK13_00_P  (via drill 0.25)
  Top 0.152: v46.16,54.23 46.02,54.09 arc45 45.91,53.82 45.91,53.53 arc-45 45.73,53.08 44.75,52.1 arc-45 44.3,51.92 39.92,51.92 arc-45 39.47,52.1 37.94,53.64 arc45 37.49,53.82 21.29,53.82 arc45 20.84,53.64 16.13,48.93 arc-45 15.68,48.74 11.11,48.74 arc45 10.66,48.56 9.61,47.51 arc-45 9.16,47.33 PCIE-NORTH.A13
  Bottom 0.152: ZED1.87 v46.16,54.23
BANK13_01_N
  Bottom 0.152: ZED1.90 45.36,47.73 arc45 45.43,47.55 45.53,47.45 arc-45 45.6,47.27 45.6,43.54 arc-45 45.42,43.09 41.4,39.07 arc-45 40.95,38.89 35.79,38.89 arc45 35.34,38.7 33.17,36.53 arc-45 32.72,36.35 29.54,36.35 arc-45 29.09,36.53 28.28,37.34 arc-45 28.09,37.79 28.09,45.24 arc90 27.46,45.87 27.16,45.87 arc-45 26.71,46.06 M-LVDS.1
BANK13_01_P
  Bottom 0.152: ZED1.88 46.16,47.73 arc-45 46.08,47.55 45.98,47.45 arc45 45.91,47.27 45.91,43.42 arc-45 45.72,42.97 41.52,38.77 arc-45 41.08,38.58 35.92,38.58 arc45 35.47,38.4 33.3,36.23 arc-45 32.85,36.04 29.41,36.04 arc-45 28.96,36.23 27.97,37.22 arc-45 27.79,37.66 27.79,45.19 arc90 27.41,45.57 27.16,45.57 arc45 26.71,45.38 M-LVDS.2
BANK13_02_N  (via drill 0.25)
  Top 0.152: v43.76,54.23 arc-45 43.83,54.4 43.93,54.5 arc45 44.01,54.68 44.01,54.71 arc90 43.63,55.09 20.65,55.09 arc45 20.2,54.91 15.5,50.2 arc-45 15.05,50.01 11.6,50.01 arc90 11.48,49.88 11.48,49.88 arc-90 11.32,49.75 11.28,49.75 arc-90 11.15,49.88 11.15,49.88 arc85 11,50.01 10.93,50.01 arc85 10.78,49.88 arc-90 10.63,49.76 10.58,49.76 arc-90 10.43,49.88 arc60 10.31,50.08 arc60 10.1,50.08 9.96,49.94 arc-90 9.74,49.94 9.74,49.94 arc-90 9.74,50.15 9.9,50.32 arc90 9.9,50.53 9.9,50.53 arc90 9.69,50.53 9.52,50.37 arc-90 9.31,50.37 9.31,50.37 arc-90 9.31,50.59 9.47,50.75 arc135 9.35,50.97 9.23,50.97 arc45 8.79,50.78 PCIE-NORTH.A16
  Bottom 0.152: ZED1.93 v43.76,54.23
BANK13_02_P  (via drill 0.25)
  Top 0.152: v44.56,54.23 arc45 44.49,54.4 44.39,54.5 arc-45 44.31,54.68 44.31,54.76 arc90 43.68,55.4 20.53,55.4 arc45 20.08,55.21 15.37,50.5 arc-45 14.92,50.32 10.81,50.32 arc-45 10.37,50.5 9.73,51.14 arc45 9.28,51.33 PCIE-NORTH.A17
  Bottom 0.152: ZED1.91 v44.56,54.23
BANK13_03_N
  Bottom 0.152: ZED1.94 43.76,47.71 arc45 43.83,47.53 43.93,47.43 arc-45 44,47.25 44,46.15 arc-90 43.72,45.87 41.31,45.87 arc-45 40.86,46.06 38.15,48.77 arc-45 37.97,49.22 37.97,49.71 arc45 37.78,50.16 37.52,50.42 arc-45 37.33,50.87 37.33,52.5 arc45 37.14,52.95 34.89,55.21 arc45 34.44,55.4 20.53,55.4 arc45 20.08,55.21 15.37,50.5 arc-45 14.92,50.32 13.2,50.32 arc-45 12.75,50.5 9.71,53.54 arc45 9.26,53.73 7.16,53.73 arc45 6.71,53.54 5.58,52.41 arc-45 5.13,52.23 3.58,52.23 arc45 3.13,52.04 2.02,50.93 arc45 1.83,50.48 PCIE-NORTH.B16
BANK13_03_P
  Bottom 0.152: ZED1.92 44.56,47.71 arc-45 44.49,47.53 44.38,47.43 arc45 44.31,47.25 44.31,46.15 arc-90 43.72,45.57 41.19,45.57 arc-45 40.74,45.75 37.85,48.65 arc-45 37.66,49.09 37.66,49.59 arc45 37.47,50.03 37.21,50.3 arc-45 37.03,50.75 37.03,52.38 arc45 36.84,52.83 34.76,54.91 arc45 34.31,55.09 20.65,55.09 arc45 20.2,54.91 15.5,50.2 arc-45 15.05,50.01 13.07,50.01 arc-45 12.62,50.2 12.56,50.26 | PCIE-NORTH.B17 4.24,51.74 arc-45 4.69,51.92 5.26,51.92 arc45 5.71,52.11 6.84,53.24 arc-45 7.29,53.42 9.13,53.42 arc-45 9.58,53.24 9.7,53.12 arc-90 9.7,52.9 9.63,52.83 arc90 9.63,52.61 9.66,52.59 arc90 9.87,52.59 9.94,52.66 arc-90 10.16,52.66 10.18,52.64 arc-90 10.18,52.42 10.11,52.35 arc90 10.11,52.13 10.14,52.11 arc90 10.35,52.11 10.42,52.18 arc-90 10.64,52.18 10.66,52.16 arc-90 10.66,51.94 10.59,51.87 arc90 10.59,51.66 10.62,51.63 arc90 10.83,51.63 10.9,51.7 arc-90 11.12,51.7 11.14,51.68 arc-90 11.14,51.46 11.07,51.39 arc90 11.07,51.18 11.09,51.15 arc90 11.31,51.15 11.38,51.22 arc-90 11.6,51.22 11.62,51.2 arc-90 11.62,50.98 11.55,50.91 arc90 11.55,50.7 11.58,50.67 arc90 11.79,50.67 11.86,50.74 arc-90 12.08,50.74 12.1,50.72 12.56,50.26 | 12.56,50.26
BANK13_04_N  (via drill 0.25)
  Top 0.152: v42.96,6.87 42.96,6.79 arc45 43.03,6.61 43.13,6.5 arc-45 43.21,6.32 43.21,5.87 arc-90 42.57,5.23 39.92,5.23 arc45 39.47,5.05 37.94,3.51 arc-45 37.49,3.33 21.28,3.33 arc-45 20.83,3.51 16.12,8.22 arc45 15.68,8.41 12.18,8.41 arc-90 12.02,8.56 12.02,8.61 arc90 11.87,8.76 11.84,8.76 arc90 11.69,8.61 11.69,8.56 arc-90 11.54,8.41 11.45,8.42 arc-120 11.35,8.63 11.36,8.65 arc60 11.35,8.87 11.3,8.92 arc90 11.09,8.92 11.05,8.88 arc-90 10.86,8.91 10.87,8.91 arc-90 10.84,9.1 10.87,9.13 arc90 10.87,9.35 10.85,9.37 arc90 10.64,9.37 10.6,9.34 10.58,9.29 arc-90 10.4,9.16 arc-90 10.25,9.31 10.25,9.33 arc90 10.09,9.48 10.06,9.48 arc90 9.91,9.33 9.91,9.31 arc-90 9.76,9.16 9.73,9.16 arc-90 9.57,9.31 9.57,9.33 arc90 9.42,9.48 9.39,9.48 arc90 9.24,9.33 9.24,9.31 arc-90 9.09,9.16 9,9.16 PCIE-SOUTH.A6
  Bottom 0.152: ZED1.195 v42.96,6.87
BANK13_04_P  (via drill 0.25)
  Top 0.152: v43.76,6.87 43.76,6.78 arc-45 43.68,6.6 43.59,6.5 arc45 43.51,6.32 43.51,5.82 arc-90 42.62,4.93 40.04,4.93 arc45 39.59,4.74 38.06,3.21 arc-45 37.61,3.02 21.16,3.02 arc-45 20.71,3.21 16,7.92 arc45 15.55,8.1 11.48,8.1 arc-45 11.03,8.29 10.68,8.64 arc45 10.23,8.82 PCIE-SOUTH.A5
  Bottom 0.152: ZED1.193 v43.76,6.87
BANK13_05_N  (via drill 0.25)
  Top 0.152: v42.96,2.92 arc45 43.03,2.75 43.13,2.65 arc-45 43.21,2.47 43.21,2.44 arc-90 42.83,2.06 20.65,2.06 arc-45 20.2,2.24 15.49,6.95 arc45 15.04,7.14 9.29,7.14 arc45 8.84,6.95 arc-45 8.53,6.82 PCIE-SOUTH.A3
  Bottom 0.152: ZED1.196 v42.96,2.92
BANK13_05_P  (via drill 0.25)
  Top 0.152: v43.76,2.92 arc-45 43.69,2.75 43.59,2.65 arc45 43.51,2.47 43.51,2.39 arc-90 42.88,1.75 20.52,1.75 arc-45 20.07,1.94 15.36,6.65 arc45 14.91,6.83 11.9,6.83 arc90 11.74,6.68 11.74,6.65 arc-90 11.59,6.5 11.51,6.5 arc-90 11.36,6.65 11.36,6.68 arc90 11.2,6.83 11.12,6.83 arc90 10.97,6.68 10.97,6.65 arc-90 10.82,6.5 10.74,6.5 arc-90 10.59,6.65 10.59,6.68 arc90 10.43,6.83 10.35,6.83 arc90 10.2,6.68 10.2,6.65 arc-90 10.05,6.5 9.97,6.5 arc-90 9.81,6.65 9.81,6.68 arc90 9.66,6.83 9.34,6.83 PCIE-SOUTH.A2
  Bottom 0.152: ZED1.194 v43.76,2.92
BANK13_06_N
  Bottom 0.152: ZED1.199 41.36,9.44 arc-45 41.43,9.62 41.53,9.72 arc45 41.6,9.9 41.6,11 arc90 41.32,11.28 40.68,11.28 arc45 40.23,11.09 38.15,9.01 arc45 37.97,8.56 37.97,7.44 arc-45 37.78,6.99 37.52,6.73 arc45 37.33,6.28 37.33,4.64 arc-45 37.14,4.2 36.16,3.21 arc-45 35.71,3.02 21.16,3.02 arc-45 20.71,3.21 16,7.92 arc45 15.55,8.1 13.48,8.1 arc-45 13.03,8.29 11.97,9.35 arc90 11.75,9.35 11.74,9.34 arc-90 11.53,9.34 11.52,9.35 arc-90 11.52,9.57 11.52,9.58 arc90 11.52,9.79 11.51,9.81 | PCIE-SOUTH.A8 8.49,11.98 arc-45 8.94,12.17 9.15,12.17 9.24,12.08 arc-90 9.24,11.86 9.23,11.85 arc90 9.23,11.64 9.25,11.62 arc90 9.46,11.62 9.47,11.63 arc-90 9.69,11.63 | 11.51,9.81 arc90 11.3,9.81 11.29,9.8 arc-90 11.07,9.8 11.06,9.81 arc-90 11.06,10.03 11.07,10.04 arc90 11.07,10.25 11.05,10.26 arc90 10.84,10.26 10.83,10.25 arc-90 10.62,10.25 10.6,10.27 arc-90 10.6,10.48 10.61,10.49 arc90 10.61,10.71 10.6,10.72 arc90 10.38,10.72 10.37,10.71 arc-90 10.16,10.71 10.15,10.72 arc-90 10.15,10.94 10.16,10.95 arc90 10.16,11.16 10.14,11.18 arc90 9.93,11.18 9.92,11.17 arc-90 9.7,11.17 9.69,11.18 arc-90 9.69,11.39 9.7,11.4 arc90 9.7,11.62 9.69,11.63 | 9.69,11.63 | 11.51,9.81
BANK13_06_P
  Bottom 0.152: ZED1.197 42.16,9.44 arc45 42.09,9.62 41.98,9.72 arc-45 41.91,9.9 41.91,11 arc90 41.32,11.58 40.55,11.58 arc45 40.1,11.4 37.85,9.14 arc45 37.66,8.69 37.66,7.56 arc-45 37.47,7.12 37.21,6.85 arc45 37.03,6.4 37.03,4.77 arc-45 36.84,4.32 36.03,3.51 arc-45 35.58,3.33 21.28,3.33 arc-45 20.83,3.51 16.12,8.22 arc45 15.68,8.41 13.61,8.41 arc-45 13.16,8.59 9.11,12.64 arc45 8.66,12.82 PCIE-SOUTH.A9
C_CK_E
  Bottom 0.152: U$14.1 SPI-E.2
C_CK_W
  Bottom 0.152: U$1.1 SPI-W.2
C_SI_E
  Bottom 0.152: U$15.1 75.82,29.84 76.71,28.96 104.89,28.96 arc45 105.34,29.14 106.59,30.39 arc-45 107.04,30.57 SPI-E.1
C_SI_W
  Bottom 0.152: U$2.1 46.1,27.3 45.21,28.19 17.03,28.19 arc45 16.58,28.01 15.33,26.76 arc-45 14.88,26.57 SPI-W.1
C_SO_E
  Bottom 0.152: U$16.1 75.82,27.3 76.71,28.19 104.89,28.19 arc-45 105.34,28.01 106.59,26.76 arc45 107.04,26.57 SPI-E.3
C_SO_W
  Bottom 0.152: U$11.1 46.1,29.84 45.21,28.96 17.03,28.96 arc-45 16.58,29.14 15.33,30.39 arc45 14.88,30.57 SPI-W.3
CDONE_N  (via drill 0.25)
  Top 0.203: v92.19,35.69 U7.2
  Bottom 0.203: U6.11 v92.19,35.69
CDONE_S  (via drill 0.25)
  Top 0.203: v29.73,21.46 U3.2
  Bottom 0.203: U2.11 v29.73,21.46
CRESET_N  (via drill 0.25)
  Top 0.203: v92.69,36.07 U7.1
  Bottom 0.203: U6.10 v92.69,36.07
CRESET_S  (via drill 0.25)
  Top 0.203: U3.1 v29.23,21.08
  Bottom 0.203: U2.10 v29.23,21.08
E_EN  (via drill 0.25)
  Top 0.203: X-EAST.14 80.89,39.33 | 80.89,39.33 arc45 81.34,39.51 | 81.34,39.51 v81.91,40.07 | 80.89,39.33 arc45 81.34,39.51
  Bottom 0.203: v81.91,40.07 82.48,40.07 arc45 82.93,40.25 83.38,40.71 arc-45 83.83,40.89 86.99,40.89 arc45 87.44,41.08 88.06,41.7 arc-45 88.51,41.89 U6.23 88.92,41.91
E_I2C_V  (via drill 0.25)
  Top 0.203: X-EAST.11 84.84,39.83 | X-EAST.13 84.71,39.33 | 84.84,39.83 84.84,39.4 84.71,39.53 v84.71,39.58 | 84.71,39.33 v84.71,39.58 | v84.71,39.58 84.71,39.83 | 84.71,39.33 84.58,39.33 84.58,39.83 84.71,39.83 | 84.71,39.83 84.84,39.83
  Route2 0.406: v84.71,39.58 arc45 85.14,39.75 85.54,40.15 arc45 85.72,40.6 85.72,44.82 arc-45 85.91,45.27 88.08,47.44 arc-45 88.53,47.62 91.18,47.62 arc45 91.63,47.81 91.89,48.07 arc45 92.08,48.52 92.08,50.54 arc45 91.89,50.99 PWR-NE.1
E_SCK  (via drill 0.25)
  Top 0.203: X-EAST.12 79.38,39.83 | 79.38,39.83 arc-45 78.94,40.01 | 79.38,39.83 arc-45 78.94,40.01 | 78.94,40.01 v78.87,40.08
  Bottom 0.203: v78.87,40.08 79.18,40.39 arc-45 79.63,40.58 82.35,40.58 arc45 82.8,40.76 87.32,45.28 arc-45 87.77,45.47 90.79,45.47 arc-45 91.24,45.28 91.5,45.02 arc-45 91.69,44.57 U6.29
E_SCL  (via drill 0.25)
  Top 0.203: X-EAST.15 v87.5,38.83
  Bottom 0.203: U6.19 88.3,39.89 arc45 88.03,39.78 87.62,39.37 arc45 87.5,39.1 v87.5,38.83
E_SDA  (via drill 0.25)
  Top 0.203: X-EAST.17 87.28,38.33 v87.5,38.1
  Bottom 0.203: U6.18 88.39,39.39 arc90 88.01,39.01 88.01,38.48 arc-90 87.63,38.1 v87.5,38.1
E_SDI  (via drill 0.25)
  Top 0.203: X-EAST.16 81.14,38.83 arc45 81.59,39.01 v81.91,39.33
  Bottom 0.203: U6.22 88.54,41.39 arc45 88.27,41.28 87.31,40.32 arc-45 86.86,40.13 84.72,40.13 arc45 84.27,39.95 84.08,39.76 arc-45 83.64,39.58 82.42,39.58 arc45 81.97,39.39 v81.91,39.33
E_SDI_V  (via drill 0.25)
  Top 0.152: 84.71,37.33 84.84,37.33 84.84,37.47
  Top 0.203: X-EAST.19 84.84,37.83 84.84,38.55 84.71,38.55 | X-EAST.21 84.71,37.33 | 84.84,37.4 84.84,37.47 84.84,38.1 | 84.71,37.33 84.71,38.55 | 84.71,37.33 84.58,37.33 84.58,38.55 84.71,38.55 | 84.71,38.55 84.71,38.54 v84.71,38.42
  Route2 0.406: v84.71,38.42 85.14,38.42 arc45 85.59,38.6 85.72,38.73 86.5,39.56 arc43 86.68,40 86.68,44.19 arc-45 86.86,44.64 88.4,46.17 arc-45 88.85,46.36 92.45,46.36 arc45 92.9,46.54 94.43,48.07 arc45 94.62,48.52 94.62,50.54 arc45 94.43,50.99 PWR-NE.3
E_SDO  (via drill 0.25)
  Top 0.203: X-EAST.18 81.4,38.33 | 81.4,38.33 arc45 81.85,38.51 | 81.85,38.51 v81.91,38.58 | 81.4,38.33 arc45 81.85,38.51
  Bottom 0.203: U6.20 88.28,40.39 arc45 87.83,40.2 87.44,39.81 arc-45 86.99,39.62 85.73,39.62 arc45 85.28,39.44 85.11,39.26 arc-45 84.66,39.08 82.67,39.08 arc45 82.22,38.89 v81.91,38.58
E_VE  (via drill 0.25)
  Top 0.203: 81.53,18.82 81.53,18.32 | 81.53,18.32 81.53,17.4 | X-EAST.86 81.53,18.32 | 81.79,17.02 81.79,18.82 81.53,18.82 | 81.79,17.02 v81.66,17.14 | 81.53,17.02 v81.66,17.14 | v81.66,17.14 81.66,18.8 | X-EAST.79 84.84,19.82 | 84.84,19.32 84.84,18.29 | X-EAST.81 84.84,19.32 | 84.84,19.32 84.84,19.82 | 84.58,17.02 84.58,19.82 84.71,19.82 | v84.71,17.14 84.71,19.82 | 84.84,17.02 v84.71,17.14 | v84.71,17.14 84.58,17.02 | 84.84,19.82 84.71,19.82 | X-EAST.83 84.84,18.82 84.84,17.02 | 84.84,17.02 84.58,17.02 | 81.66,17.02 81.79,17.02 | 81.53,18.82 X-EAST.84 | X-EAST.88 81.53,17.82 81.53,17.02 | 81.53,17.02 81.66,17.02 | 81.66,17.02 v81.66,17.14
  Route15 0.508: v81.66,17.14 v84.71,17.14 84.71,13.98 arc45 84.89,13.53 PWR-SE.1
E_VE_CV  (via drill 0.25)
  Top 0.152: v77.47,13.33 77.26,13.54 arc-45 77.15,13.81 77.15,16.67 arc-45 77.26,16.94 77.54,17.21 arc-45 77.81,17.32 X-EAST.90
  Bottom 0.152: PB-SE.7 84.89,14.49 arc45 84.44,14.3 84.04,13.9 arc-45 83.59,13.72 82.34,13.72 arc45 81.89,13.53 81.88,13.52 arc-45 81.43,13.33 v77.47,13.33
E_VE_OV  (via drill 0.25)
  Top 0.152: X-EAST.93 87.92,15.32 arc-45 88.19,15.21 88.3,15.1 arc45 88.57,14.99 v89.95,14.99
  Bottom 0.152: PB-SE.10 v89.95,14.99
E_VE_UV  (via drill 0.25)
  Top 0.152: X-EAST.91 88.06,15.82 arc-45 88.33,15.71 88.44,15.6 arc45 88.72,15.49 v92.62,15.49
  Bottom 0.152: PB-SE.12 v92.62,15.49
GND  (via drill 0.25, 0.33, 3.17 pad 4.5)
  Bottom 0.305: U2.EP v31.24,17.27 | U6.EP v90.68,39.88
  other vias: 81.91,8.89 81.91,3.81 40.01,8.89 40.01,3.81 81.91,6.35 40.01,6.35 81.96,50.8 81.96,53.34 81.91,48.26 77.15,25.4 75.88,24.13 77.79,24.13 76.52,22.86 75.25,21.59 73.98,20.32 72.71,19.05 74.61,22.86 73.34,21.59 72.07,20.32 74.61,19.05 75.88,20.32 77.15,21.59 78.42,22.86 76.45,26.61 75.25,25.4 73.98,24.13 72.71,22.86 71.44,21.59 70.17,20.32 68.9,19.05 67.63,17.78 66.36,16.51 65.09,15.24 63.82,13.97 62.61,12.76 61.47,11.62 63.18,11.43 64.45,12.7 65.72,13.97 66.99,15.24 68.26,16.51 77.6,27.75 77.79,20.32 76.52,19.05 75.25,17.78 73.98,16.51 73.34,17.78 71.44,17.78 70.8,19.05 74.61,15.24 72.71,15.24 72.07,16.51 70.17,16.51 70.8,15.24 71.44,13.97 73.34,13.97 74.96,11.77 72.56,11.77 72.56,10.57 70.16,10.57 70.17,12.7 67.76,11.77 67.76,10.57 68.26,12.7 46.96,12.97 68.9,15.24 69.53,13.97 67.63,13.97 66.36,12.7 65.09,11.43 62.96,10.57 65.36,10.57 70.16,11.77 60.56,10.57 77.15,17.78 78.42,19.05 75.25,13.97 69.53,17.78 74.96,12.97 74.96,10.57 78.11,26.35 77.6,29.4 76.45,30.54 75.25,31.75 73.98,33.02 72.71,34.29 71.44,35.56 70.17,36.83 68.9,38.1 67.63,39.37 66.36,40.64 65.09,41.91 63.82,43.18 77.15,31.75 75.88,33.02 74.61,34.29 73.34,35.56 72.07,36.83 70.8,38.1 68.26,40.64 66.99,41.91 65.72,43.18 62.96,45.38 68.9,41.91 67.63,43.18 70.8,41.91 54.96,46.58 72.56,42.98 72.56,44.17 74.96,41.77 74.96,45.38 74.96,46.58 72.71,38.1 73.34,39.37 74.61,38.1 75.88,36.83 77.15,35.56 78.42,34.29 73.98,36.83 75.25,35.56 76.52,34.29 77.79,33.02 78.11,30.8 75.25,39.37 76.52,38.1 77.79,36.83 75.88,40.64 77.15,39.37 77.79,40.64 77.36,41.77 77.36,42.98 77.36,44.17 77.36,45.38 77.36,46.58 70.16,44.17 62.96,46.58 74.96,44.17 74.96,42.98 72.56,46.58 70.16,46.58 52.56,46.58 70.17,40.64 72.07,40.64 71.44,39.37 72.71,41.91 69.53,39.37 70.16,45.38 65.36,44.17 67.76,45.38 67.76,46.58 65.36,45.38 62.61,44.39 61.47,45.53 60.45,45.53 59.31,44.39 58.1,43.18 56.83,41.91 55.56,40.64 54.29,39.37 53.02,38.1 51.75,36.83 50.48,35.56 49.21,34.29 47.94,33.02 46.67,31.75 45.47,30.54 44.32,29.4 44.32,27.75 45.47,26.61 46.67,25.4 47.94,24.13 49.21,22.86 50.48,21.59 51.75,20.32 53.02,19.05 54.29,17.78 55.56,16.51 56.83,15.24 58.1,13.97 59.31,12.76 57.47,12.7 56.2,13.97 54.93,15.24 53.66,16.51 51.12,19.05 49.85,20.32 47.94,20.32 46.04,20.32 44.13,20.32 48.58,21.59 46.67,21.59 44.77,21.59 47.31,22.86 45.4,22.86 43.5,22.86 46.04,24.13 44.13,24.13 44.77,25.4 43.5,26.35 43.5,24.77 49.21,19.05 47.31,19.05 45.4,19.05 43.5,19.05 48.58,17.78 46.67,17.78 44.77,17.78 46.04,16.51 53.02,15.24 47.31,15.24 73.98,40.64 57.36,46.58 70.16,42.98 72.56,45.38 67.76,44.17 74.96,50.8 72.56,50.8 70.16,50.8 67.76,50.8 65.36,50.8 62.96,50.8 60.56,50.8 48.16,50.8 77.36,50.8 78.42,45.72 80.01,44.77 80.01,46.67 81.03,45.72 83.82,38.42 82.55,36.83 82.55,35.56 82.55,33.97 82.55,32.38 82.55,30.8 82.55,26.35 82.55,24.77 82.55,23.18 82.55,21.59 82.55,38.1 78.11,10.48 79.06,11.43 80.01,12.38 80.01,10.48 81.91,12.38 80.96,11.43 81.91,44.77 72.07,12.7 76.16,6.35 72.56,6.35 70.16,6.35 67.76,6.35 65.77,6.35 60.56,6.35 54.96,6.35 46.96,6.35 44.56,6.35 52.56,6.35 65.36,46.58 57.47,44.45 55.56,44.45 53.66,44.45 51.75,44.45 56.2,43.18 54.29,43.18 54.93,41.91 53.02,41.91 53.66,40.64 51.12,38.1 49.21,38.1 47.31,38.1 45.4,38.1 43.5,38.1 49.85,36.83 47.94,36.83 46.04,36.83 44.13,36.83 48.58,35.56 46.67,35.56 44.77,35.56 47.31,34.29 45.4,34.29 43.5,34.29 46.04,33.02 44.13,33.02 44.77,31.75 50.48,39.37 49.85,40.64 50.48,43.18 49.21,41.91 48.58,39.37 48.58,43.18 50.56,46.58 49.85,44.45 51.12,41.91 51.75,40.64 47.31,41.91 47.94,40.64 52.39,39.37 52.39,43.18 52.56,45.38 48.96,44.17 46.96,44.17 46.67,43.18 45.4,41.91 44.13,40.64 46.04,40.64 44.77,39.37 46.67,39.37 43.5,30.8 52.39,13.97 48.96,12.97 46.96,10.57 51.12,15.24 50.48,13.97 50.56,11.77 51.75,16.51 49.21,15.24 47.94,16.51 49.85,16.51 52.39,17.78 50.48,17.78 52.56,12.97 52.56,10.57 54.96,12.97 54.29,13.97 50.56,12.97 46.96,14.17 50.56,10.57 52.56,11.77 54.96,11.77 56.96,11.77 54.96,10.57 56.96,10.57 58.74,11.43 46.96,11.77 44.56,15.38 48.96,11.77 44.56,14.17 44.13,16.51 39.37,33.97 39.37,35.56 39.37,32.38 39.37,30.8 39.37,26.35 39.37,23.18 39.37,21.59 39.37,20.32 39.37,24.77 38.1,20.32 53.76,55.88 51.36,55.88 56.16,55.88 53.76,1.27 56.16,1.27 51.36,1.27 107.95,3.81 13.97,3.81 13.97,53.34 107.95,53.34 48.96,10.57 72.56,1.9 74.96,1.9 70.16,1.9 67.76,1.9 65.36,1.9 62.96,1.9 60.56,1.9 46.96,1.9 44.56,1.9 74.96,55.25 72.56,55.25 70.16,55.25 67.76,55.25 65.36,55.25 62.96,55.25 60.56,55.25 46.96,55.25 77.36,55.25 54.96,1.9 52.56,1.9 52.56,55.25 54.96,55.25 40.01,53.34 40.01,48.26 40.01,50.8 39.37,29.4 39.37,27.75 82.55,29.4 82.55,27.75 39.37,36.83 39.37,38.1 38.1,38.1 38.1,36.83 41.91,44.77 40.01,44.77 39.37,41.59 37.47,44.77 38.1,16.83 38.1,18.73 39.37,15.56 38.1,39.37 39.37,39.37 76.52,15.24 75.88,16.51 77.79,16.51 82.55,15.56 29.72,17.27 31.24,15.75 29.72,15.75 78.42,38.1 83.82,40.32 82.55,41.59 92.2,39.88 90.68,41.4 92.2,41.4 83.82,36.83 39.37,19.05 38.1,24.77 38.1,32.38 38.1,30.8 38.1,29.4 38.1,27.75 38.1,26.35 38.1,23.18 38.1,33.97 83.82,33.97 83.82,32.38 83.82,30.8 83.82,29.4 83.82,27.75 83.82,26.35 83.82,24.77 83.82,23.18 84.45,12.38 87.5,41.91 34.42,15.24 48.96,14.17 58.56,10.57 44.56,12.97 44.56,11.77 44.56,10.57 48.96,46.58 48.96,45.38 50.56,45.38 54.93,45.72 56.83,45.72 58.74,45.72 46.96,46.58 46.96,45.38 59.58,46.58 54.96,50.8 52.56,50.8 45.76,50.8 62.97,6.35 41.91,12.38 42.55,11.75 43.18,11.11 40.01,12.38 41.91,6.35 44.16,50.8 43.5,46.36 44.96,46.58 44.96,45.38 41.91,46.67 78.74,16.51 44.13,42.86 77.79,14.29 27.94,31.11 26.04,33.02 90.49,21.59 26.04,34.61 27.62,33.02 31.43,33.02 33.97,33.02 31.43,34.29 31.43,35.56 31.43,36.83 31.43,31.75 23.49,35.24 23.49,37.15 23.49,38.73 23.49,33.34 26.04,31.75 33.97,36.2 33.97,34.29 33.97,31.75 28.89,35.56 27.3,37.15 27.3,39.69 21.59,36.2 21.59,37.47 21.59,38.73 21.59,34.92 19.69,38.73 19.69,37.47 19.69,36.2 19.69,34.92 17.78,34.92 17.78,36.2 17.78,37.47 17.78,38.73 15.88,38.73 15.88,37.47 15.88,36.2 15.88,34.92 13.97,34.92 13.97,36.2 13.97,37.47 13.97,38.73 10.16,38.1 10.16,36.2 10.16,34.29 10.8,40.64 12.06,39.37 12.06,34.29 12.06,36.2 87.95,22.54 87.95,20.64 87.95,25.4 90.49,25.4 90.49,22.86 93.34,25.4 95.25,25.4 97.16,25.4 97.16,24.13 95.25,24.13 99.06,22.86 99.06,21.59 100.97,25.4 100.97,24.13 100.97,22.86 100.97,21.59 97.16,21.59 102.87,25.4 102.87,24.13 102.87,22.86 104.78,25.08 104.78,23.18 104.46,21.59 106.68,23.18 106.36,21.59 108.27,21.59 103.82,31.11 103.5,32.7 103.19,34.29 102.87,35.88 104.46,33.66 104.46,35.56 106.36,33.66 106.68,35.88 108.9,36.2 21.59,19.68 21.59,20.95 21.59,22.23 21.59,18.41 19.69,22.23 19.69,20.95 19.69,19.68 19.69,18.41 17.78,18.41 17.78,19.68 17.78,20.95 17.78,22.23 15.88,22.23 15.88,20.95 15.88,19.68 15.88,18.41 13.97,18.41 13.97,19.68 13.97,20.95 13.97,22.23 82.55,20.32 82.55,19.05 83.82,19.05 83.82,20.32 83.82,17.78 82.55,17.78 12.06,20.95 10.8,22.23 9.52,23.49 12.06,19.68 12.06,18.41 10.16,20.32 10.16,18.41 9.52,41.91 12.7,22.86 11.43,24.13 10.16,25.4 23.49,18.41 23.49,20 23.49,21.91 23.49,23.81 24.77,35.88 24.77,33.97 24.77,32.07 24.77,21.27 24.77,23.18 24.77,25.08 26.04,22.54 26.04,24.45 26.04,26.04 27.94,24.77 27.94,26.04 27.94,23.49 24.77,19.37 26.04,20.64 27.94,22.23 33.97,22.86 33.97,24.77 33.97,26.04 33.97,20.95 32.39,24.77 32.39,23.49 32.39,22.23 32.39,26.04 29.53,36.83 28.58,37.78 10.8,50.8 9.52,52.07 13.97,49.53 15.88,49.85 17.15,51.12 18.41,52.39 19.69,53.66 20.95,54.61 22.86,54.61 24.77,54.61 26.67,54.61 28.58,54.61 30.48,54.61 32.39,54.61 34.29,54.61 34.29,53.34 34.29,55.88 36.2,55.88 36.2,54.61 36.2,52.7 38.1,54.61 38.1,55.88 40.01,54.61 40.01,55.88 41.91,54.61 41.91,55.88 45.09,55.25 38.1,52.7 32.39,55.88 30.48,55.88 28.58,55.88 26.67,55.88 24.77,55.88 22.86,55.88 20.95,55.88 19.69,55.56 18.41,54.29 17.15,53.02 9.52,49.53 9.52,46.67 10.8,47.94 12.06,49.53 16.83,48.89 18.1,50.16 19.37,51.44 10.16,7.94 10.16,6.03 12.06,7.62 13.97,7.62 15.88,7.3 17.15,6.03 18.41,4.76 19.69,3.49 20.95,2.54 22.86,2.54 24.77,2.54 26.67,2.54 28.58,2.54 30.48,2.54 32.39,2.54 34.29,2.54 36.2,2.54 38.1,2.54 40.01,2.54 40.01,1.27 38.1,1.27 36.2,1.27 34.29,1.27 32.39,1.27 30.48,1.27 28.58,1.27 26.67,1.27 24.77,1.27 22.86,1.27 20.95,1.27 19.05,2.22 17.78,3.49 19.05,6.03 17.78,7.3 16.51,8.57 41.91,1.27 34.29,3.81 36.2,4.45 38.1,4.45 14.61,8.89 10.16,10.16 10.16,12.38 12.7,9.84 11.43,11.11 101.92,31.11 101.92,32.38 101.92,33.66 101.92,34.92 100.01,31.11 100.01,32.38 100.01,33.66 100.01,34.92 98.11,34.92 98.11,33.66 98.11,32.38 98.11,31.11 96.2,31.11 96.2,32.38 96.2,33.66 96.2,34.92 89.53,33.66 89.53,32.38 89.53,34.92 89.53,31.11 87.95,32.7 87.95,31.11 87.95,34.61 87.95,36.51 93.98,34.92 93.98,33.66 93.98,32.38 93.98,31.11 105.73,37.15 107.63,37.15 107.63,39.05 105.73,39.05 105.73,40.96 105.73,42.86 107.63,40.96 107.63,42.86 109.54,42.86 109.54,40.96 109.54,39.05 109.54,37.15 103.82,37.15 103.82,39.05 103.82,40.96 103.82,42.86 107.63,20 105.73,20 102.87,21.27 109.54,20 103.82,18.1 105.73,18.1 107.63,18.1 109.54,18.1 103.82,16.19 103.82,14.29 105.73,14.29 107.63,14.29 109.54,14.29 109.54,16.19 107.63,16.19 105.73,16.19 95.25,22.86 97.16,22.86 99.06,25.4 109.54,44.77 109.54,12.38 97.79,26.67 98.43,24.13 90.49,24.13 29.65,29.4 31.31,29.4 31.31,27.75 29.65,27.75 28.58,31.75 92.71,21.59 87.95,24.13 105.41,34.61 107.63,34.92 105.09,32.38 103.82,20 90.61,27.75 92.27,27.75 92.27,29.4 90.61,29.4 58.42,34.29 57.15,33.02 62.87,22.23 64.77,24.13 56.52,32.38 65.41,24.77 59.05,34.92 63.5,22.86 5.08,21.82 5.08,19.82 5.08,13.82 5.08,11.82 5.08,9.82 5.08,7.82 5.08,5.82 5.08,34.33 5.08,36.33 5.08,38.33 5.08,40.33 5.08,42.33 5.08,48.33 5.08,50.33 12.06,48.26 13.97,48.26 15.88,48.26
  pour Top (rank 3): 111.76,0 0,0 0,57.15 111.76,57.15
  pour Bottom (rank 3): 111.76,0 0,0 0,57.15 111.76,57.15
  pour Route2 (rank 3): 111.76,0 0,0 0,57.15 111.76,57.15
  pour Route15 (rank 3): 111.76,0 0,0 0,57.15 111.76,57.15
GPA0_E
  Top 0.152: HDR-SE.12 97.06,11.24 arc-45 96.87,11.69 96.87,15.9 arc45 96.68,16.35 95.44,17.59 arc-45 95.25,18.04 95.25,20.06 arc45 95.06,20.51 91.37,24.2 arc-45 91.19,24.65 U7.15
GPA0_W
  Top 0.152: HDR-NW.12 24.86,45.91 arc-45 25.05,45.46 25.05,41.25 arc45 25.24,40.8 26.48,39.56 arc-45 26.67,39.11 26.67,37.09 arc45 26.86,36.64 30.55,32.95 arc-45 30.73,32.5 U3.15
GPA1_E
  Top 0.152: HDR-SE.11 97.87,15.53 arc45 97.68,15.98 96.07,17.59 arc-45 95.88,18.04 95.88,20.06 arc45 95.7,20.51 91.88,24.32 arc-45 91.69,24.77 U7.16
GPA1_W